# Altium PCB PCB1.PcbDoc
Units mm, origin at the board's own origin, x right, y up, seen from the top; angles counter-clockwise.
Board outline 38 x 45.9 mm, 2 copper layers (Top Layer, Bottom Layer); 36 components, 41 nets, 156 pads, 38 vias.
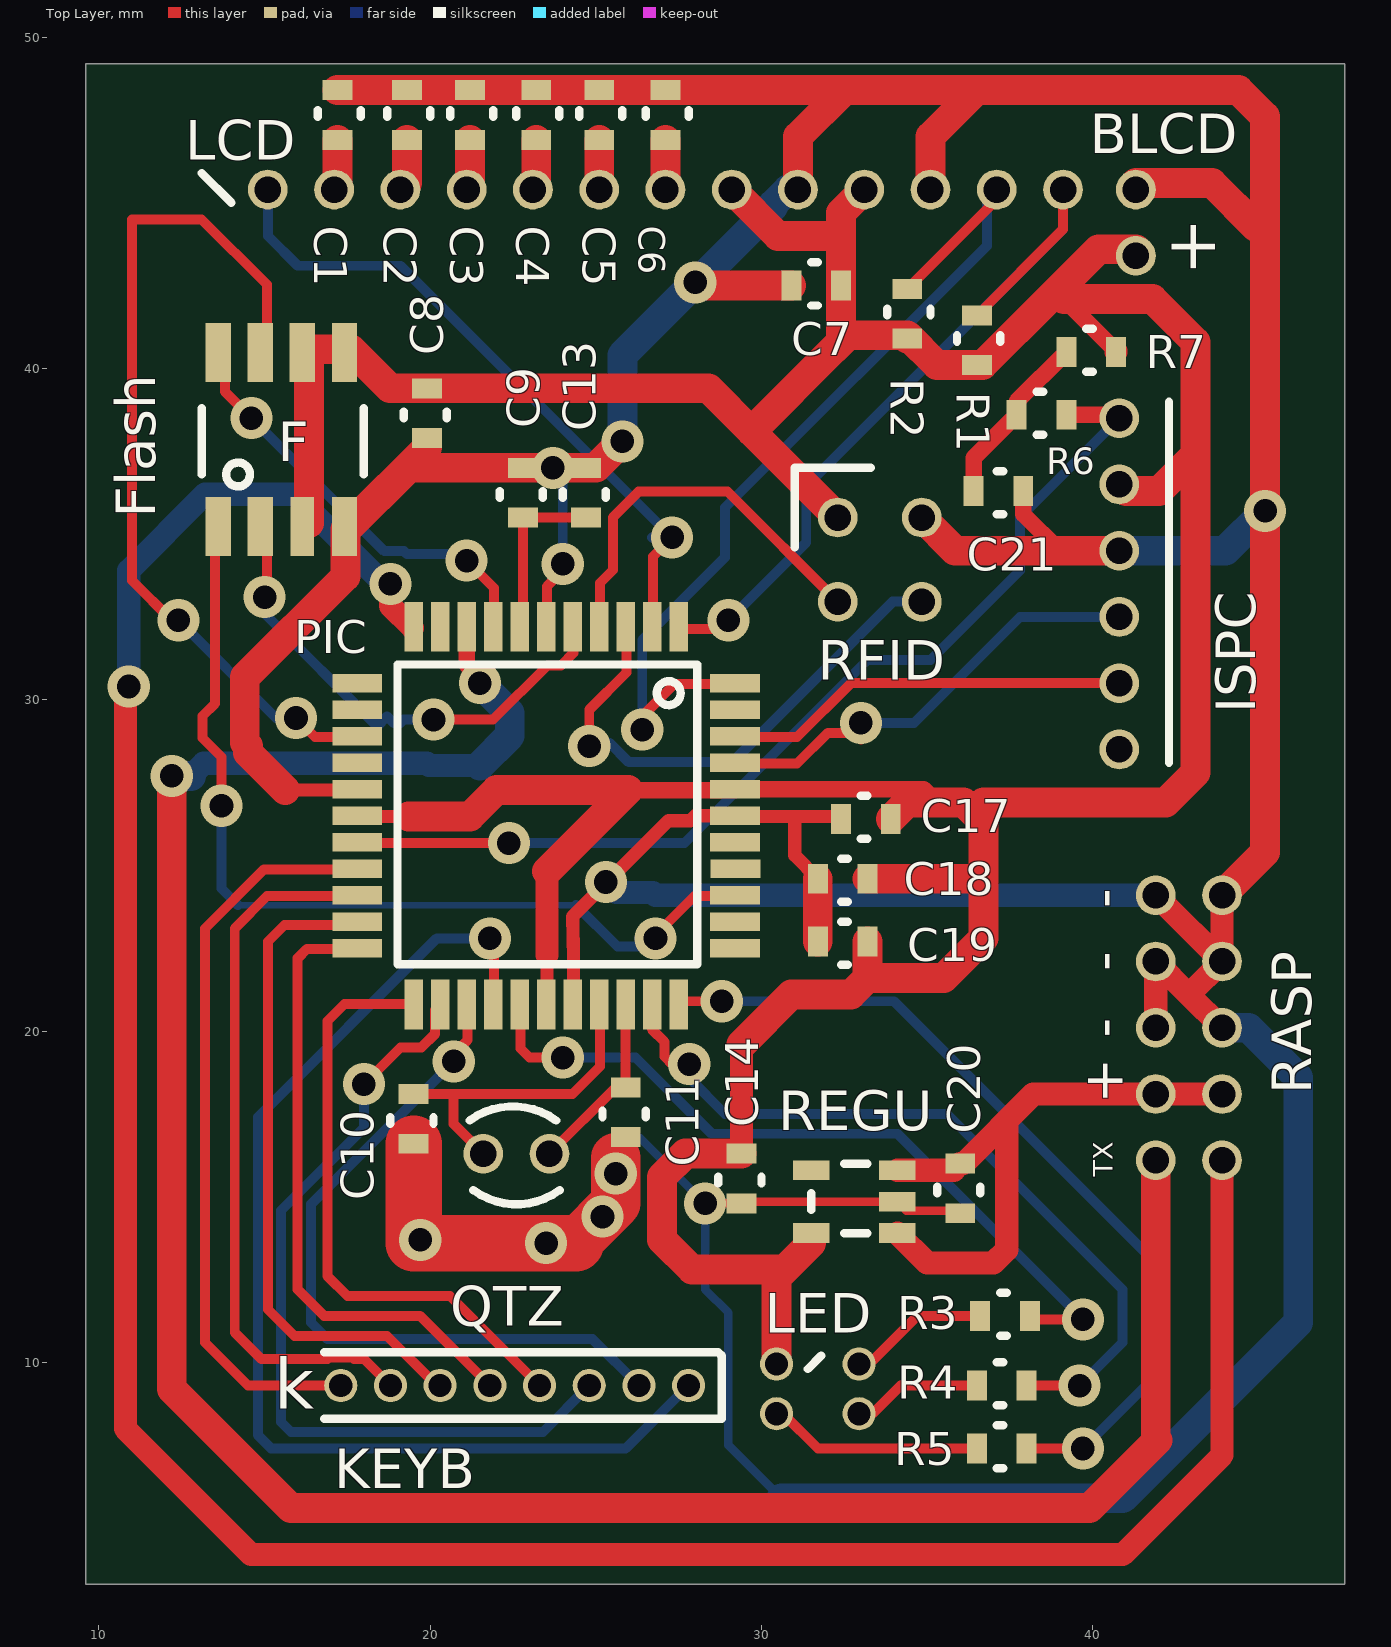
[diagram p0: Top Layer view]
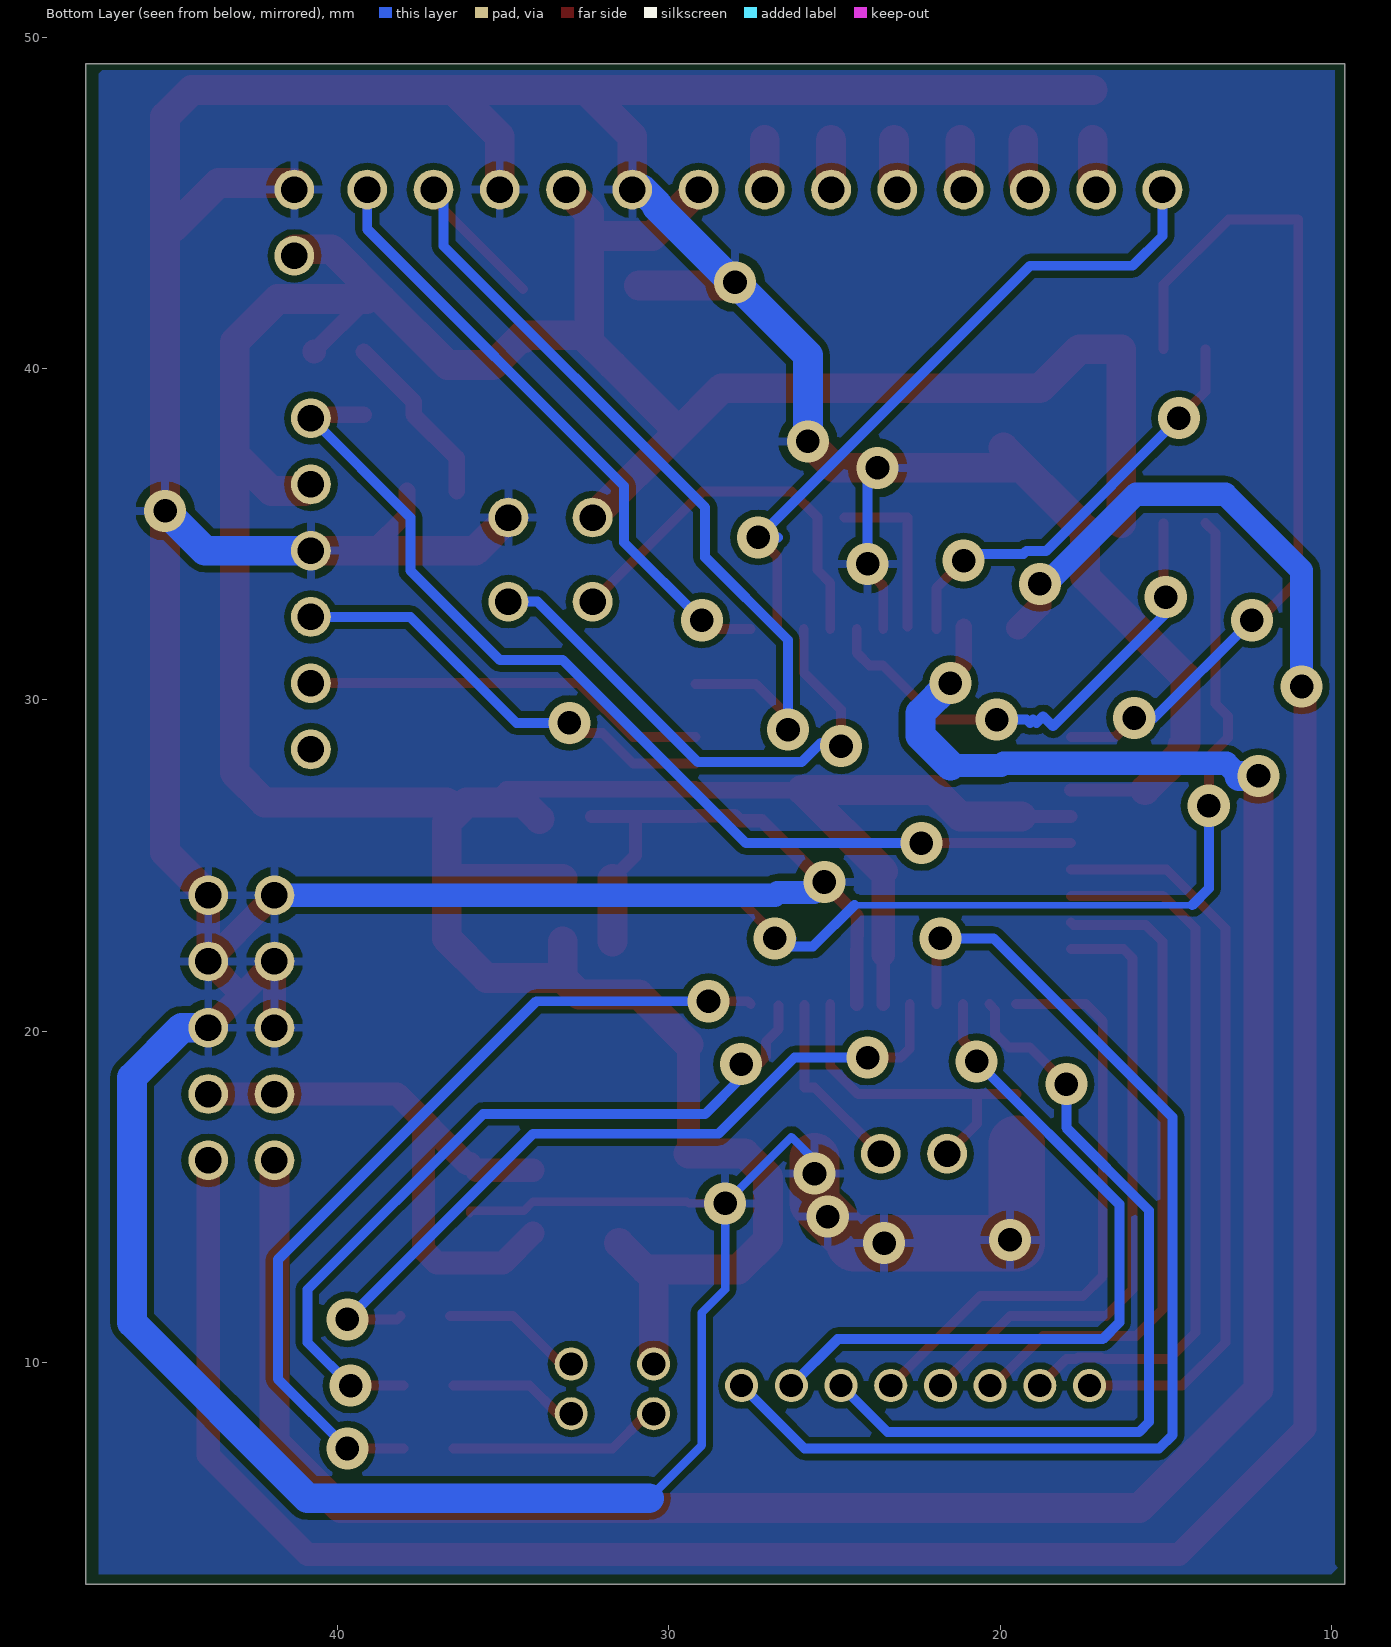
[diagram p1: Bottom Layer view, seen from below]

## Layer stack, top to bottom
Top Solder: solder mask 0.0102, Solder Resist, Dk 3.5
Top Layer: signal copper 0.0356
Dielectric 1: dielectric 0.32, FR-4, Dk 4.8
Bottom Layer: signal copper 0.0356
Bottom Solder: solder mask 0.0102, Solder Resist, Dk 3.5

## Board outline
9.6,3.3 47.6,3.3 47.6,49.2 9.6,49.2

## Design rules (kind name [scope] priority, off if disabled: settings)
Clearance [All] p1: gap=0.2
HoleSize [All] p1: absolutevalues=TRUE maxlimit=2.54 minlimit=0.3 maxpercent=80.000 minpercent=20.000
MinimumSolderMaskSliver [All] p1: minsoldermaskwidth=0
PolygonConnect [All] p1: connectstyle=Relief reliefconductorwidth=0.254 reliefentries=4 polygonreliefangle="90 Angle" airgapwidth=0.254
RoutingVias [All] p1: holewidth=0.711 width=1.27 viastyle="Through Hole" minholewidth=0.3 minwidth=0.7 maxholewidth=5 maxwidth=5
SilkToSilkClearance [All] p1: silktosilkclearance=0.1
SilkToSolderMaskClearance [IsPad] p1: minsilkscreentomaskgap=0.1 clearancetoexposedcopper=TRUE
SolderMaskExpansion [All] p1: expansion=0.102
UnpouredPolygon [All] p1: allowunpoured=FALSE
Width [All] p1: maxlimit=2 minlimit=0.2 preferedwidth=0.254
25 further rules are at their usual default settings.

## Classes and differential pairs
component class RFID: U1
component class "Raspberry Pi": U3
component class PIC: C9 C10 C11 C13 C14 C17 C18 C19 C20 C21 ISPC QTZ R6 R7 REGU
component class Led: P2 R3 R4 R5
component class LCD: C1 C2 C3 C4 C5 C6 C7 P1 P3 R1 R2
component class Flash: C8 Flash

## Components (designator, comment, footprint, x,y, rotation, side; value= is the part's Value field where it differs from the comment)
BLCD "lcd backlight" "lcd bk" 41.3,43.4 r90 top (schematic designator P3)
C1 "Cap" cond 17.2,48.4 r270 top
C2 "Cap" cond 19.3,48.4 r270 top
C3 "Cap" cond 21.2,48.4 r270 top
C4 "Cap" cond 23.2,48.4 r270 top
C5 "Cap" cond 25.1,48.4 r270 top
C6 "Cap" cond 27.1,48.4 r270 top
C7 "Cap" cond 30.9,42.5 r0 top
C8 "Cap" cond 19.9,37.9 r90 top
C9 "Cap" cond 22.8,35.5 r90 top
C10 "Cap" cond 19.5,16.6 r90 top
C11 "Cap" cond 25.9,16.8 r90 top
C13 "Cap" cond 24.7,35.5 r90 top
C14 "Cap" cond 29.4,14.8 r90 top
C17 "Cap" cond 32.4,26.4 r0 top
C18 "Cap" cond 33.2,24.6 r180 top
C19 "Cap" cond 33.2,22.7 r180 top
C20 "Cap" cond 36,14.5 r90 top
C21 "Cap" cond 37.9,36.3 r180 top
Flash "Flash" flash 13.6,35.8 r0 top (schematic designator U2)
ISPC "ISCP" ISCP 40.8,38.5 r270 top (schematic designator P5)
KEYB "clavier" keypad 17.3,9.3 r0 top (schematic designator U4)
LCD "LCD" lcd 15.1,45.4 r0 top (schematic designator P1)
LED "ledRGB" "LED RGB" 30.1,10.6 r270 top (schematic designator P2)
PIC "PIC32_1" PIC32 29.2,30.5 r270 top (schematic designator U6)
QTZ "Quartz 8MHz" quartz 23.6,16.3 r180 top (schematic designator Y1)
R1 "Res2" res 36.5,41.6 r270 top
R2 "Res2" res 34.4,42.4 r270 top
R3 "Res2" res 36.6,11.4 r0 top
R4 "Res2" res 36.5,9.3 r0 top
R5 "Res2" res 36.5,7.4 r0 top
R6 "Res2" res 37.7,38.6 r0 top
R7 "Res2" res 39.2,40.5 r0 top
RASP "Raspberry_pi_zero_w" RASPB 41.9,16.1 r0 top (schematic designator U3)
REGU "regulateur" regulateur 34.1,15.8 r180 top (schematic designator U7)
RFID "UEXT connector" "Conneteur UEXT" 32.3,35.5 r270 top (schematic designator U1)

## Footprints (in the part's own frame and the unit in brackets; to place one, negate y for a bottom-side part, rotate by r counter-clockwise, add the part's x,y. Pads: shape width x height; smd on the part's side, far side on the other; paste and mask are expansions set on the pad)
cond [mm]
  rect 0.6x0.9 smd: 1(0,0) 2(1.5,0)
  silkscreen extent 0.6,-0.6 0.8,0.7
"Conneteur UEXT" [mm]
  round 1.2 hole 0.8: 1(0,0) 2(0,2.54) 3(2.54,0) 4(2.54,2.54)
  silkscreen extent -1.5,-1.3 0.9,1
flash [mm]
  rect 0.76x1.78 smd: 1(0,-0.572) 2(1.27,-0.572) 4(3.81,-0.572) 5(0,4.68) 6(1.27,4.68) 7(2.54,4.68) 8(3.81,4.68)
  rect 0.72x1.78 smd: 3(2.54,-0.572)
  silkscreen extent -0.5,0.64 4.4,3
ISCP [mm]
  round 1.2 hole 0.8: GND(4,0) PGC(8,0) PGD(6,0) PGM(10,0) RST(0,0) VCC(2,0)
  silkscreen extent -0.5,1.5 10.4,1.5
keypad [mm]
  round 1 hole 0.7: 1(0,0) 2(1.5,0) 3(3,0) 4(4.5,0) 5(6,0) 6(7.5,0) 7(9,0) 8(10.5,0)
  silkscreen extent -0.5,-1 11.5,1
lcd [mm]
  round 1.2 hole 0.8: 1(0,0) 2(2,0) 3(4,0) 4(6,0) 5(8,0) 6(10,0) 7(12,0) 8(14,0) 9(16,0) 10(18,0) 11(20,0) 12(22,0) 13(24,0)
  silkscreen extent -2,-0.4 -1.1,0.5
"lcd bk" [mm]
  round 1.2 hole 0.8: 1(0,0) 2(2,0)
"LED RGB" [mm]
  round 1 hole 0.7: 1(0.65,0.355) 2(0.65,2.845) 3(2.15,2.845) 4(2.15,0.355)
  silkscreen extent 0.4,1.3 0.8,1.7
PIC32 [mm]
  rect 1.5x0.55 smd: 1(-1.7,-1.7) 2(-1.7,-2.5) 3(-1.7,-3.3) 4(-1.7,-4.1) 5(-1.7,-4.9) 6(-1.7,-5.7) 7(-1.7,-6.5) 8(-1.7,-7.3) 9(-1.7,-8.1) 10(-1.7,-8.9) 11(-1.7,-9.7) 23(9.7,-9.7) 24(9.7,-8.9) 25(9.7,-8.1) 26(9.7,-7.3) 27(9.7,-6.5) 28(9.7,-5.7) 29(9.7,-4.9) 30(9.7,-4.1) 31(9.7,-3.3) 32(9.7,-2.5) 33(9.7,-1.7)
  rect 0.55x1.5 smd: 12(0,-11.4) 13(0.8,-11.4) 14(1.6,-11.4) 15(2.4,-11.4) 16(3.2,-11.4) 17(4,-11.4) 18(4.8,-11.4) 19(5.6,-11.4) 20(6.4,-11.4) 21(7.2,-11.4) 22(8,-11.4) 34(8,0) 35(7.2,0) 36(6.4,0) 37(5.6,0.013) 38(4.8,0) 39(4,0) 40(3.2,0) 41(2.4,0) 42(1.6,0) 43(0.8,0) 44(0,0)
  silkscreen extent -0.56,-10.19 8.49,-1.14
quartz [mm]
  round 1.2 hole 0.8: 1(0,0) 2(2,0)
  silkscreen extent -0.31,-1.42 2.41,1.52
RASPB [mm]
  round 1.2 hole 0.8: 2(0,2) 4(2,2) 6(0,4) 8(0,0) 10(2,0) 14(2,4) 20(0,6) 25(0,8) 34(2,6) 39(2,8)
regulateur [mm]
  rect 1.1x0.6 smd: 1(0,1.9) 2(0,0.95) 3(0,0) 4(2.6,0) 5(2.6,1.9)
  silkscreen extent 0.9,-0.2 2.6,1.9
res [mm]
  rect 0.6x0.9 smd: 1(0,0) 2(1.5,0)
  silkscreen extent 0.6,-0.6 0.8,0.7

## Part data
BLCD: library part "Header 2H", "Header, 2-Pin, Right Angle"
C1 C2 C3 C4 C5 C6 C7 C8 C9 C10 C11 C13 C14 C17 C18 C19 C20 C21: "Capacitor"
LCD: library part "Header 13", "LCD Connector"
QTZ: library part XTAL, "Crystal Oscillator"
R1 R2 R3 R4 R5 R6 R7: "Resistor"

## Via types
v1: diameter 1.27, hole 0.711, Top Layer to Bottom Layer, 38 vias

## Nets (pads, with @x,y where several pads share a name; then routed paths per layer and width w, separated by ;. In a path a pad name is that pad's centre, name@x,y a point inside that pad or via, vN(x,y) a via of type N, cw(c..) or ccw(c..) an arc to the next point about the centre after c; other vN are vias at no path point)
3.3V: BLCD.1 C7.2 C8.2 C14.2 C17.2 C18.1 C19.1 Flash.3 Flash.7 Flash.8 ISPC.VCC LCD.8 LCD.10 LED.1 PIC.17 PIC.28 PIC.40 R1.2 R2.2 R7.2 REGU.5 RFID.1 | length 137.9
  Top Layer w0.254: 31.5,13.6 REGU.5
  Top Layer w0.4: PIC.17@17.863,26.475 19.35,26.475 ; PIC.28@23.525,20.813 23.525,22.3
  Top Layer w0.5: 25.975,27.275 PIC.40@29.187,27.275 ; PIC.40 34.9,27.3 35.3,26.9 ; 39.128,42.1 R7.2@40.7,40.528
  Top Layer w0.7: 23.525,22.3 23.525,24.825 ; C14.2 29.4,19.6 ; 38.669,42.1 39.128,42.1 ; R7.2 R7.2@40.7,40.528
  Top Layer w0.9: Flash.3@16.34,35.328 16.34,40.58 17.61,40.58 18.79,39.4 C8.2 28.4,39.4 29.7,38.1 ; 19.35,26.475 21.2,26.475 22,27.275 25.975,27.275 23.525,24.825 ; LCD.8 30.5,44 32.4,44 ; C14.2 27.7,16.3 27,15.6 27,13.7 27.9,12.8 30.7,12.8 ; 29.4,19.6 30.9,21.1 32.7,21.1 33.2,21.6 ; LED.1 30.455,12.555 30.7,12.8 ; 31.5,13.6 30.7,12.8 ; RFID.1 29.7,38.1 ; 32.4,41 C7.2 32.4,44 ; LCD.10 32.4,44.7 32.4,44 ; C19.1 33.2,21.6 ; C18.1 36.7,24.6 ; C17.2 34.4,26.9 35.3,26.9 36.1,26.9 36.7,26.3 36.7,24.6 ; R2.2 R2.2@34.3,41 ; 36.7,26.9 42.2,26.9 43.1,27.8 43.1,37.4 ; 39.128,42.1 41.8,42.1 43.1,40.8 43.1,37.4 ; ISPC.VCC@41,36.3 42,36.3 43.1,37.4 ; BLCD.1@41.3,43.6 40.169,43.6 38.669,42.1 36.669,40.1 R1.2 35.3,40.1 34.4,41 R2.2@34.3,41 ; 29.7,38.1 30.2,38.6 31.7,40.1 32.6,41 R2.2@34.3,41 ; 33.2,21.6 35.5,21.6 36.7,22.8 36.7,24.6
5V: C20.2 RASP.2 RASP.4 REGU.1 REGU.3 | length 18
  Top Layer w0.7: REGU.1 35,13 37,13 37.4,13.4 37.4,17.1 ; REGU.3 C20.2@35.8,15.8 ; C20.2 36.1,16 38.2,18.1 RASP.2 RASP.4
GND: BLCD.2 C1.1 C2.1 C3.1 C4.1 C5.1 C6.1 C7.1 C8.1 C9.2 C10.1 C11.1 C13.2 C14.1 C17.1 C18.2 C19.2 C20.1 C21.1 Flash.4 ISPC.GND LCD.9 LCD.11 PIC.6 PIC.16 PIC.29 PIC.39 RASP.6 RASP.14 RASP.20 RASP.25 RASP.34 RASP.39 REGU.2 RFID.2 | length 223.7
  Top Layer w0.254: v1(28.3,14.8) C14.1 ; C14.1@29.45,14.85 REGU.2 34.373,14.577 36,14.577 C20.1
  Top Layer w0.3: PIC.6@23.525,32.137 23.525,33.425 23.7,33.6 23.7,33.8 v1(24,34.1)
  Top Layer w0.4: 15.625,27.275 PIC.16@17.863,27.275 ; PIC.29@24.325,20.813 24.325,22.186 24.3,23.461 27.189,26.35 27.85,26.35 28,26.5 PIC.39 ; PIC.39@29.187,26.475 31,26.475 ; C18.2 31,25.3 31,26.475 ; C17.1@32.325,26.475 31,26.475
  Top Layer w0.5: C21.1 37.9,35.6 39,34.5
  Top Layer w0.7: RASP.6 RASP.20 42.9,21.1 ; RASP.25@42.1,23.9 RASP.34 ; RASP.14 42.9,21.1 ; RASP.39 RASP.34 ; 42.9,21.1 RASP.34
  Top Layer w0.9: 15.625,27.275 14.5,28.4 14.5,28.6 14.4,28.7 14.4,30.683 17.44,33.723 Flash.4@17.44,35.09 ; C1.1 C2.1 C3.1 C4.1 C5.1 C6.1 32.5,48.4 ; Flash.4@17.44,35.158 17.474,35.124 19.35,37 C9.2 v1(23.7,37) C13.2 25,37 v1(25.8,37.8) ; Flash.4@17.61,35.328 C8.1@19.9,37.618 ; v1(28,42.6) 28.1,42.5 C7.1 ; LCD.9 31.1,47 32.5,48.4 ; C19.2 C18.2 ; RFID.2 35.84,34.5 39,34.5 ISPC.GND ; LCD.11 35.1,47 36.4,48.3 ; BLCD.2@41.3,45.6 43.6,45.6 44.95,44.25 ; RASP.39 45.2,25.4 v1(45.2,35.7) 45.2,47.6 44.4,48.4 32.5,48.4
  Top Layer w1.5: 24.4,13.6 25.6,14.8 v1(25.6,15.7) v1@25.6,16.18
  Top Layer w1.7: C10.1 19.5,13.6 24.4,13.6
  Bottom Layer w0.254: v1(25.6,15.7) 25.6,16.1 26.3,16.8 v1(28.3,14.8) 28.3,12.2 29,11.5 29,7.5 30.6,5.9
  Bottom Layer w0.3: v1(23.7,37) 24,36.7 v1(24,34.1)
  Bottom Layer w0.7: v1@25.3,24.4 v1(25.3,24.5) ; v1@25.615,24.185 26.715,24.185 26.8,24.1 RASP.25
  Bottom Layer w0.9: v1(25.8,37.8) 25.8,40.4 v1(28,42.6) 28.068,42.6 30.35,44.882 30.35,44.95 LCD.9@30.8,45.4 ; 30.6,5.9 40.9,5.9 46.2,11.2 46.2,18.6 44.7,20.1 RASP.14 ; ISPC.GND 44,34.5 v1(45.2,35.7)
  other v1: 23.5,13.6 19.7,13.7 25.2,14.4
MCLR: ISPC.RST PIC.18 R6.2 | length 30.8
  Top Layer w0.3: PIC.18@17.863,25.675 v1(22.375,25.675)
  Top Layer w0.5: R6.2 ISPC.RST@40.7,38.6
  Top Layer w0.9: ISPC.RST@40.7,38.6 ISPC.RST
  Bottom Layer w0.3: v1(22.375,25.675) 27.675,25.675 33.2,31.2 35.1,31.2 37.8,33.9 37.8,35.5 ISPC.RST
NetC1_2: C1.2 LCD.2 | length 1.5
  Top Layer w0.9: LCD.2 17.2,45.5 C1.2
NetC2_2: C2.2 LCD.3 | length 1.6
  Top Layer w0.9: LCD.3 19.3,45.6 C2.2
NetC3_2: C3.2 LCD.4 | length 1.5
  Top Layer w0.9: LCD.4 21.2,45.5 C3.2
NetC4_2: C4.2 LCD.5 | length 1.5
  Top Layer w0.9: LCD.5 23.2,45.5 C4.2
NetC5_2: C5.2 LCD.6 | length 1.5
  Top Layer w0.9: LCD.6 C5.2
NetC6_2: C6.2 LCD.7 | length 1.5
  Top Layer w0.9: LCD.7 C6.2
NetC9_1: C9.1 C13.1 PIC.7 | length 5.2
  Top Layer w0.3: PIC.7@22.8,32.212 C9.1 C13.1
NetC21_2: C21.2 R6.1 R7.1 | length 5.4
  Top Layer w0.5: C21.2 36.4,37.3 R6.1 37.7,39 R7.1
NetP1_1: LCD.1 PIC.2 | length 21.2
  Top Layer w0.3: PIC.2@26.725,32.137 26.725,34.325 v1(27.3,34.9) v1@27.05,34.9
  Bottom Layer w0.3: LCD.1 15.1,44 16,43.1 19.1,43.1 v1(27.3,34.9) v1@26.7,34.9
NetP1_12: LCD.12 PIC.44 R2.1 | length 28.4
  Top Layer w0.3: v1(26.4,29.1) 26.4,29.5 27.375,30.475 PIC.44@29.187,30.475 ; R2.1 37.1,45.1 LCD.12
  Bottom Layer w0.3: v1(26.4,29.1) 26.4,31.8 28.9,34.3 28.9,35.8 36.8,43.7 36.8,45.1 LCD.12
NetP1_13: LCD.13 PIC.1 R1.1 | length 23.6
  Top Layer w0.3: PIC.1@27.525,32.137 28.737,32.137 v1(29,32.4) ; R1.1 39.1,44.2 LCD.13
  Bottom Layer w0.3: v1(29,32.4) 31.35,34.75 31.35,36.45 39.1,44.2 LCD.13
NetP2_2: LED.2 R3.1 | length 4.3
  Top Layer w0.3: LED.2 33.25,9.95 34.7,11.4 R3.1
NetP2_3: LED.3 R4.1 | length 3.9
  Top Layer w0.3: LED.3 33.35,8.45 34.2,9.3 R4.1
NetP2_4: LED.4 R5.1 | length 6.5
  Top Layer w0.3: LED.4 30.65,8.45 31.7,7.4 R5.1
NetR3_2: PIC.27 R3.2 | length 23.3
  Top Layer w0.3: PIC.27@22.725,20.813 22.725,19.475 23,19.2 v1(24,19.2) ; R3.2 38.2,11.3 v1(39.7,11.3)
  Bottom Layer w0.3: v1(24,19.2) 26.2,19.2 28.5,16.9 34.1,16.9 v1(39.7,11.3)
NetR4_2: PIC.32 R4.2 | length 23.7
  Top Layer w0.3: PIC.32@26.687,20.775 26.687,20.055 27.067,19.675 27.067,19.233 27.3,19 v1(27.818,19) ; R4.2 v1(39.6,9.3)
  Bottom Layer w0.3: v1(27.818,19) 27.818,18.582 28.9,17.5 35.6,17.5 40.9,12.2 40.9,10.6 v1(39.6,9.3)
NetR5_2: PIC.33 R5.2 | length 25.8
  Top Layer w0.3: PIC.33@27.525,20.813 27.612,20.9 v1(28.8,20.9) ; R5.2 v1(39.7,7.4)
  Bottom Layer w0.3: v1(28.8,20.9) 34,20.9 41.8,13.1 41.8,9.5 v1(39.7,7.4)
NetU1_3: PIC.4 RFID.3 | length 12
  Top Layer w0.3: PIC.4@25.125,32.137 25.125,33.525 25.515,33.915 25.515,35.508 26.292,36.285 28.975,36.285 RFID.3
NetU1_4: PIC.3 RFID.4 | length 16.3
  Top Layer w0.3: v1(24.8,28.6) 24.8,29.7 25.925,30.825 PIC.3@25.925,32.137
  Bottom Layer w0.3: v1(24.8,28.6) 25.1,28.6 25.2,28.7 25.407,28.7 25.992,28.115 29.115,28.115 33.96,32.96 RFID.4
NetU2_1: Flash.1 PIC.36 | length 28.6
  Top Layer w0.3: v1(13.7,26.8) 13.7,28.269 13.125,28.843 13.125,29.506 13.5,29.881 13.5,35.028 Flash.1@13.8,35.328 ; v1(26.8,22.8) 26.8,22.9 27.975,24.075 PIC.36@29.187,24.075
  Bottom Layer w0.2: 14.2,23.8 24.4,23.8
  Bottom Layer w0.3: v1(13.7,26.8) 13.7,24.3 14.2,23.8 ; 24.4,23.8 25.652,22.548 v1@26.548,22.548 ; v1@26.296,22.8 v1(26.8,22.8)
NetU2_2: Flash.2 PIC.5 | length 15.4
  Top Layer w0.3: v1(15,33.1) 15.07,33.17 Flash.2@15.07,35.328 ; v1(20.1,29.4) 21.9,29.4 23.537,31.037 23.945,31.037 24.325,31.417 PIC.5@24.325,32.137
  Bottom Layer w0.3: v1(15,33.1) 15,32.6 18.4,29.2 18.7,29.5 18.9,29.3 19,29.4 19.1,29.3 19.2,29.4 v1(20.1,29.4)
NetU2_5: Flash.5 PIC.8 | length 13.2
  Top Layer w0.3: Flash.5@13.8,40.58 13.8,39.3 v1(14.6,38.5) ; v1(21.1,34.2) 21.925,33.375 PIC.8@21.925,32.137
  Bottom Layer w0.3: v1(14.6,38.5) 18.615,34.485 19.208,34.485 19.293,34.4 21.1,34.4 v1(21.1,34.2)
NetU2_6: Flash.6 PIC.14 | length 26.6
  Top Layer w0.3: v1(12.4,32.4) 12.2,32.4 11,33.6 11,44.5 13.1,44.5 15.07,42.53 Flash.6@15.07,40.58 ; v1(15.95,29.45) 16.525,28.875 PIC.14@17.863,28.875
  Bottom Layer w0.3: v1(12.4,32.4) 15.35,29.45 v1(15.95,29.45)
NetU3_8: PIC.9 RASP.8 | length 73.5
  Top Layer w0.5: PIC.9 21.1,31.056 v1@21.5,30.656
  Top Layer w0.9: v1(12.2,27.7) 12.2,9.2 15.8,5.6 39.9,5.6 41.95,7.65 41.9,7.7 RASP.8 ; v1(21.5,30.5) v1@21.5,30.656
  Bottom Layer w0.7: v1@12.783,27.7 13.168,28.085 19.898,28.085 ; 19.968,28.015 21.5,28.015
  Bottom Layer w0.9: v1(12.2,27.7) v1@12.783,27.7 ; 21.5,28.015 22.4,28.915 22.4,29.6 v1(21.5,30.5)
NetU3_10: PIC.11 RASP.10 | length 82.6
  Top Layer w0.7: v1(10.9,30.4) 10.8,30.3 10.8,8 14.6,4.2 40.9,4.2 43.9,7.2 RASP.10 ; v1(18.8,33.5) 18.8,32.837 PIC.11@19.468,32.169
  Bottom Layer w0.7: v1(10.9,30.4) 10.9,33.9 13.2,36.2 15.9,36.2 18.8,33.3 v1(18.8,33.5)
NetU4_1: KEYB.1 PIC.19 | length 22.5
  Top Layer w0.3: KEYB.1 14.5,9.3 13.2,10.6 13.2,23.1 14.975,24.875 PIC.19@17.863,24.875
NetU4_2: KEYB.2 PIC.20 | length 21.8
  Top Layer w0.3: PIC.20@17.863,24.075 15.075,24.075 14.1,23.1 14.1,10.9 14.9,10.1 16.898,10.1 16.948,10.15 17.652,10.15 17.702,10.1 18,10.1 KEYB.2
NetU4_3: KEYB.3 PIC.21 | length 20.3
  Top Layer w0.3: PIC.21@17.863,23.275 17.788,23.2 15.6,23.2 15.1,22.7 15.1,11.6 15.9,10.8 18.7,10.8 20.2,9.3 KEYB.3
NetU4_4: KEYB.4 PIC.22 | length 19
  Top Layer w0.3: PIC.22@17.863,22.475 16.275,22.475 16,22.2 16,12.2 16.8,11.4 19.7,11.4 KEYB.4
NetU4_5: KEYB.5 PIC.23 | length 18.3
  Top Layer w0.3: PIC.23@19.525,20.813 17.413,20.813 16.9,20.3 16.9,12.6 17.5,12 20.6,12 KEYB.5
NetU4_6: KEYB.6 PIC.24 | length 25
  Top Layer w0.3: v1(18,18.4) 19.1,19.5 19.732,19.5 20.15,19.918 20.15,20.638 PIC.24@20.325,20.813
  Bottom Layer w0.3: v1(18,18.4) 18,17.082 15.5,14.582 15.5,8.2 15.8,7.9 23.4,7.9 KEYB.6
NetU4_7: KEYB.7 PIC.25 | length 22.8
  Top Layer w0.3: v1(20.71,19.085) 20.625,19 20.4,19 21.125,19.725 PIC.25@21.125,20.813
  Bottom Layer w0.3: v1(20.71,19.085) 16.4,14.775 16.4,11.2 16.9,10.7 24.9,10.7 KEYB.7
NetU4_8: KEYB.8 PIC.26 | length 34.8
  Top Layer w0.3: v1(21.8,22.8) 21.925,22.675 PIC.26@21.925,20.813
  Bottom Layer w0.3: v1(21.8,22.8) 20.2,22.8 14.8,17.4 14.8,7.8 15.2,7.4 25.9,7.4 KEYB.8
PGEC3: ISPC.PGC PIC.42 | length 12.3
  Top Layer w0.3: PIC.42@29.187,28.875 31.075,28.875 32.7,30.5 ISPC.PGC
PGED3: ISPC.PGD PIC.41 | length 13.9
  Top Layer w0.3: PIC.41@29.187,28.075 31.075,28.075 32,29 32.8,29 33,28.8 v1(33,29.3)
  Bottom Layer w0.3: v1(33,29.3) 34.6,29.3 37.8,32.5 ISPC.PGD
X1: C10.2 PIC.30 QTZ.2 | length 10
  Top Layer w0.3: C10.2 20.7,18.1 ; QTZ.2 20.7,17.2 20.7,18.1 ; PIC.30@25.125,20.813 25.125,18.932 24.293,18.1 20.7,18.1
X2: C11.2 PIC.31 QTZ.1 | length 5.6
  Top Layer w0.3: QTZ.1 25.6,18.3 C11.2 PIC.31@25.9,20.788
pads on no net: ISPC.PGM PIC.10 PIC.12 PIC.13 PIC.15 PIC.34 PIC.35 PIC.37 PIC.38 PIC.43 REGU.4

## Polygon pours and split planes (outlines as drawn)
GND on Bottom Layer "Top Layer-No Net" (solid, pour order 8): 9.9,49 47.1,49 47.2,48.9 47.2,3.6 10,3.6 9.8,3.8 9.9,3.9

## Keep-outs
Mechanical 1:
  the board outline again, w0.254

## Silkscreen, mask and mechanical layers (free items; w line width, h text height)
Mechanical 1:
  lines w0.254: 9.6,2.346 9.6,2.854 ; 11.124,2.092 9.6,2.6 ; 11.124,3.108 9.6,2.6 ; 23.496,2.6 9.6,2.6 ; 33.704,2.6 47.6,2.6 ; 46.076,2.092 47.6,2.6 ; 46.076,3.108 47.6,2.6 ; 47.6,2.346 47.6,2.854 ; 47.992,4.824 48.5,3.3 ; 47.992,47.676 48.5,49.2 ; 48.246,3.3 48.754,3.3 ; 48.246,49.2 48.754,49.2 ; 48.5,19.75 48.5,3.3 ; 48.5,32.75 48.5,49.2 ; 49.008,4.824 48.5,3.3 ; 49.008,47.676 48.5,49.2
  text "45.9 (mm)" at 49.414,20.004 h1.52 r90
  text "38 (mm)" at 23.75,1.686 h1.52
Drill Drawing:
  circle w0.025: c-12.235,62.288 r0.635
  lines w0.025: -12.87,66.733 -11.6,66.733 -12.235,65.463 -12.87,66.733 ; -12.87,69.273 -11.6,69.273 -11.6,70.543 -12.87,70.543 -12.87,69.273
  lines w0.381: -14.6,60.51 277.265,60.51 ; -14.6,71.94 277.265,71.94 ; -0.608,56.7 -0.608,75.75 ; 13.105,56.7 13.105,75.75 ; 41.037,56.7 41.037,75.75 ; 53.886,56.7 53.886,75.75 ; 72.524,56.7 72.524,75.75 ; 102.742,56.7 102.742,75.75 ; 129.15,56.7 129.15,75.75 ; 155.558,56.7 155.558,75.75 ; 181.967,56.7 181.967,75.75 ; 208.375,56.7 208.375,75.75 ; 242.249,56.7 242.249,75.75 ; -14.6,56.7 277.265,56.7 277.265,75.75 -14.6,75.75 -14.6,56.7
  text "Symbol" at -12.314,73.083 h1.83
  text "Count" at 0.535,73.083 h1.83
  text "Hole Size" at 14.248,73.083 h1.83
  text "Plated" at 42.18,73.083 h1.83
  text "Hole Type" at 55.029,73.083 h1.83
  text "Drill Layer Pair" at 73.667,73.083 h1.83
  text "Via/Pad" at 103.885,73.083 h1.83
  text "Pad Shape" at 130.293,73.083 h1.83
  text "Template" at 156.701,73.083 h1.83
  text "Description" at 183.11,73.083 h1.83
  text "Hole Tolerance (+)" at 209.518,73.083 h1.83
  text "Hole Tolerance (-)" at 243.392,73.083 h1.83
  text "12" at 0.535,69.273 h1.52
  text "0.700mm (27.56mil)" at 14.248,69.273 h1.52
  text "PTH" at 42.18,69.273 h1.52
  text "Round" at 55.029,69.273 h1.52
  text "0.000mm (0.00mil)" at 73.667,69.273 h1.52
  text "0.000mm (0.00mil)" at 103.885,69.273 h1.52
  text "0.000mm (0.00mil)" at 130.293,69.273 h1.52
  text "0.000mm (0.00mil)" at 156.701,69.273 h1.52
  text "0.000mm (0.00mil)" at 183.11,69.273 h1.52
  text "0.000mm (0.00mil)" at 209.518,69.273 h1.52
  text "0.000mm (0.00mil)" at 243.392,69.273 h1.52
  text "37" at 0.535,65.463 h1.52
  text "0.800mm (31.50mil)" at 14.248,65.463 h1.52
  text "PTH" at 42.18,65.463 h1.52
  text "Round" at 55.029,65.463 h1.52
  text "0.000mm (0.00mil)" at 73.667,65.463 h1.52
  text "0.000mm (0.00mil)" at 103.885,65.463 h1.52
  text "0.000mm (0.00mil)" at 130.293,65.463 h1.52
  text "0.000mm (0.00mil)" at 156.701,65.463 h1.52
  text "0.000mm (0.00mil)" at 183.11,65.463 h1.52
  text "0.000mm (0.00mil)" at 209.518,65.463 h1.52
  text "0.000mm (0.00mil)" at 243.392,65.463 h1.52
  text "38" at 0.535,61.653 h1.52
  text "0.711mm (28.00mil)" at 14.248,61.653 h1.52
  text "PTH" at 42.18,61.653 h1.52
  text "Round" at 55.029,61.653 h1.52
  text "0.000mm (0.00mil)" at 73.667,61.653 h1.52
  text "0.000mm (0.00mil)" at 103.885,61.653 h1.52
  text "0.000mm (0.00mil)" at 130.293,61.653 h1.52
  text "0.000mm (0.00mil)" at 156.701,61.653 h1.52
  text "0.000mm (0.00mil)" at 183.11,61.653 h1.52
  text "0.000mm (0.00mil)" at 209.518,61.653 h1.52
  text "0.000mm (0.00mil)" at 243.392,61.653 h1.52
  text "87 Total" at 0.535,57.843 h1.52

## Text inside footprints (layer, text, board x,y; h text height)
BLCD: Top Overlay "+" at 43.7,42.8 h1.52 r90
Flash: Top Overlay "F" at 15.4,37.2 h1.2
KEYB: Top Overlay "k" at 15.3,8.6 h1.52
RASP: Top Overlay "TX" at 40.6,15.6 h0.6 r90; Top Overlay "+" at 40.9,17.8 h1.2 r90; Top Overlay "-" at 40.9,19.8 h1.2 r90; Top Overlay "-" at 40.9,21.8 h1.2 r90; Top Overlay "-" at 40.9,23.7 h1.2 r90